# Altium PCB cold-sample-board-rev2.PcbDoc
Units mm, origin at the board's own origin, x right, y up, seen from the top; angles counter-clockwise.
Board outline 101.6 x 44.47 mm, 2 copper layers (Top Layer, Bottom Layer); 150 components, 85 nets, 346 pads, 160 vias.
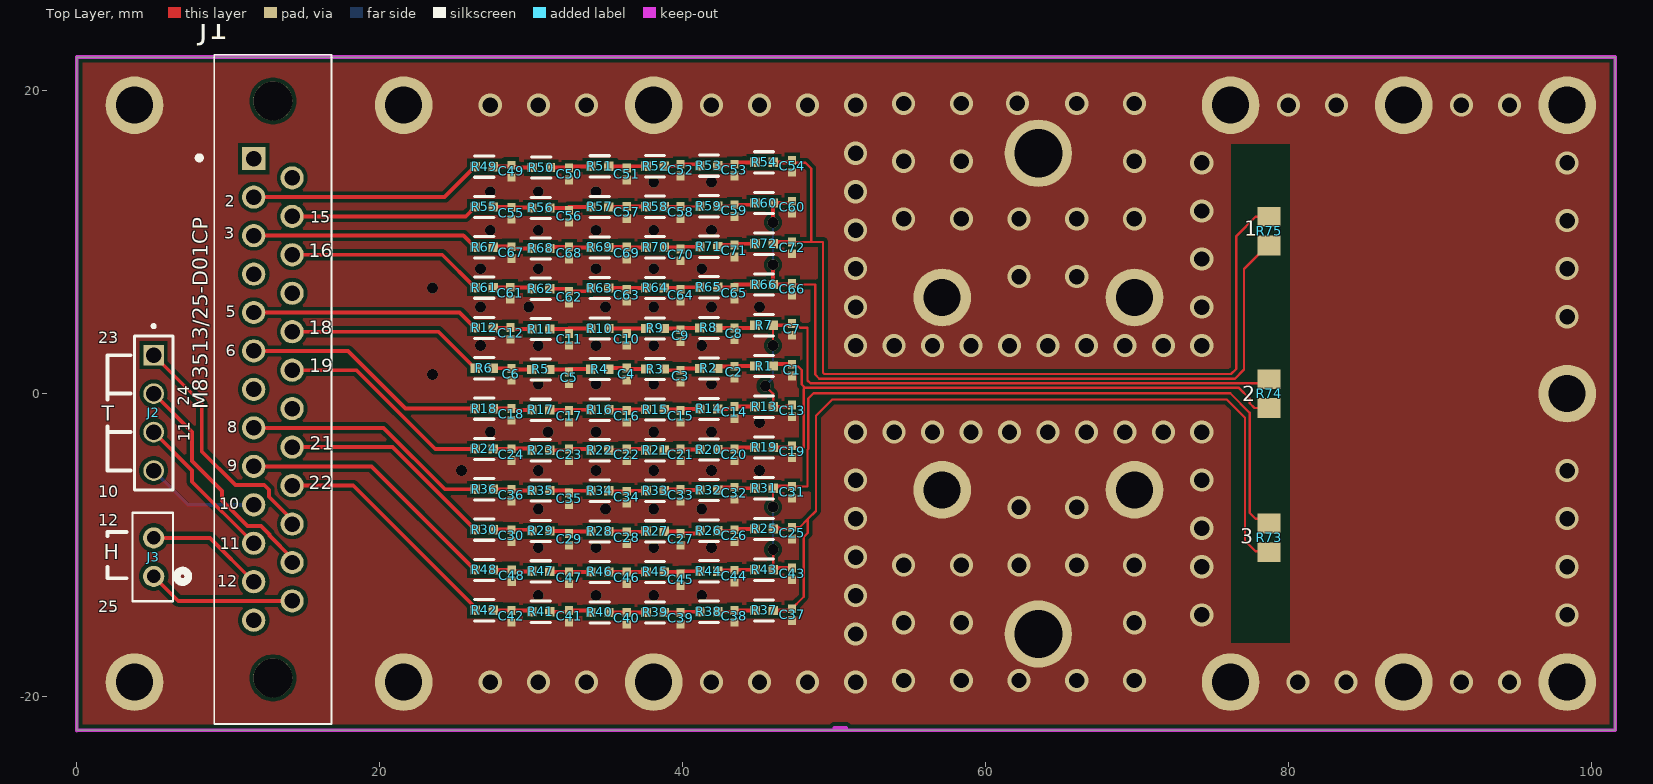
[diagram p0: Top Layer view]
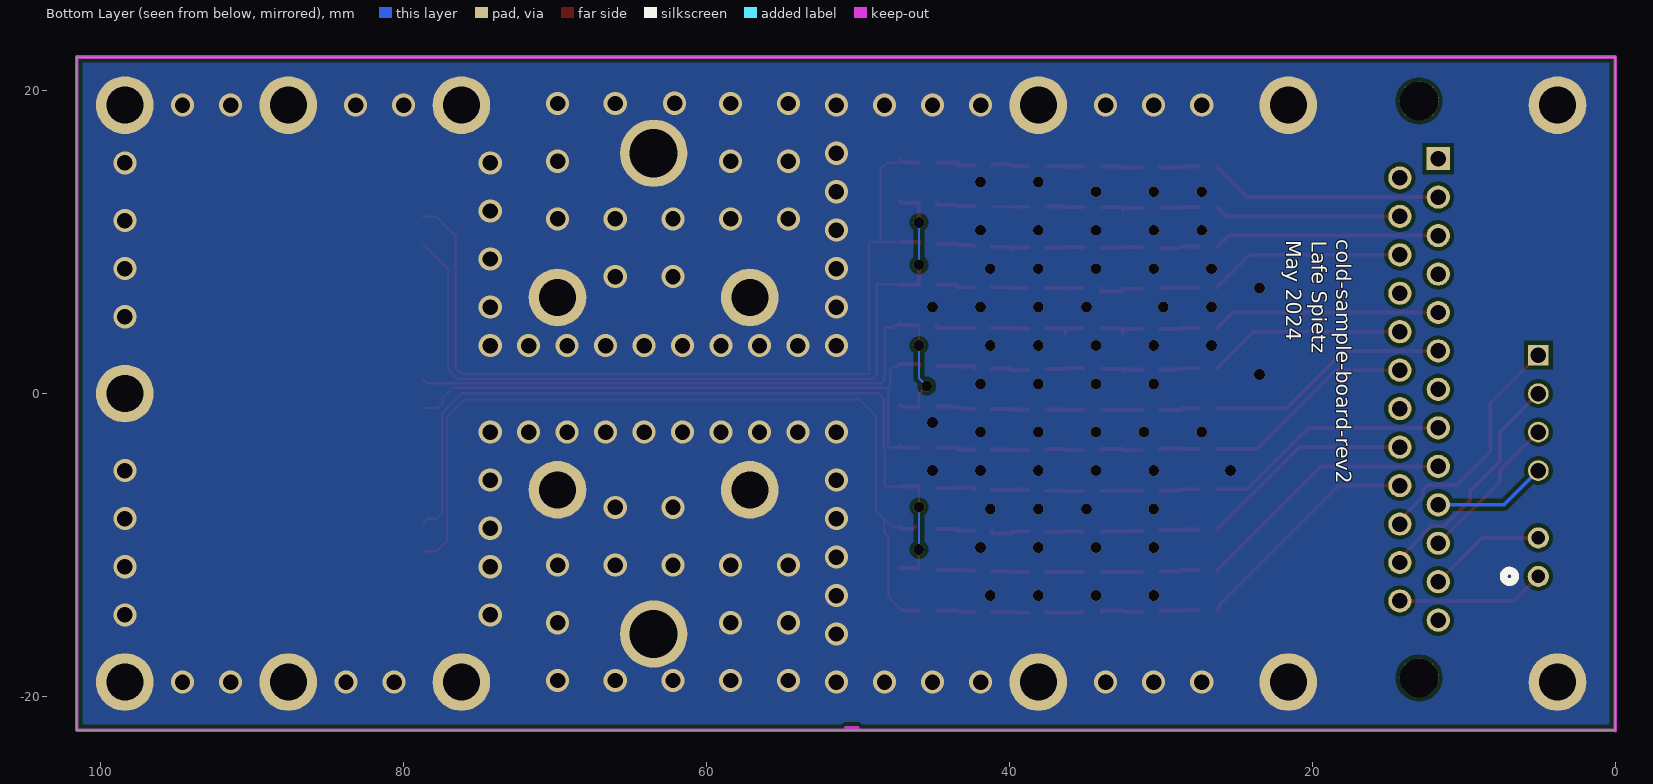
[diagram p1: Bottom Layer view, seen from below]

## Layer stack, top to bottom
Top Solder: solder mask 0.0102, Solder Resist, Dk 3.5
Top Layer: signal copper 0.0356
Dielectric 1: dielectric 0.32, FR-4, Dk 4.8
Bottom Layer: signal copper 0.0356
Bottom Solder: solder mask 0.0102, Solder Resist, Dk 3.5

## Board outline
0,-22.243 0,22.225 101.6,22.225 101.6,-22.225

## Design rules (kind name [scope] priority, off if disabled: settings)
Clearance [All] p1: gap=0.254 ignorepadtopadclearanceinfootprint=FALSE except(0: Arc-Hole Track-Hole SMDPad-Hole THPad-Hole Via-Hole Fill-Hole Poly-Hole Region-Hole Text-Hole; 0.152: Arc-Arc Arc-Track Track-Track)
PolygonConnect [All] p1: connectstyle=Direct reliefconductorwidth=0.254 reliefentries=4 polygonreliefangle="90 Angle" airgapwidth=0.254
RoutingVias [All] p1: holewidth=0.711 width=1.27 viastyle="Through Hole" minholewidth=0.711 minwidth=1.27 maxholewidth=0.711 maxwidth=1.27
SolderMaskExpansion [All] p1: expansion=0.102 istentingtop=FALSE
Width [All] p1: maxlimit=0.635 minlimit=0.152 preferedwidth=0.152 minimp=50.000000 maximp=50.000000 favimp=50.000000
30 further rules are at their usual default settings.

## Components (designator, comment, footprint, x,y, rotation, side; value= is the part's Value field where it differs from the comment)
C1 "04023C103MAT2A" CAPC1005X56X25LL10T15 47.244,1.557 r90 top
C2 "04023C103MAT2A" CAPC1005X56X25LL10T15 43.434,1.413 r90 top
C3 "04023C103MAT2A" CAPC1005X56X25LL10T15 39.878,1.159 r90 top
C4 "04023C103MAT2A" CAPC1005X56X25LL10T15 36.322,1.295 r90 top
C5 "04023C103MAT2A" CAPC1005X56X25LL10T15 32.512,1.041 r90 top
C6 "04023C103MAT2A" CAPC1005X56X25LL10T15 28.702,1.277 r90 top
C7 "04023C103MAT2A" CAPC1005X56X25LL10T15 47.244,4.248 r90 top
C8 "04023C103MAT2A" CAPC1005X56X25LL10T15 43.434,3.953 r90 top
C9 "04023C103MAT2A" CAPC1005X56X25LL10T15 39.878,3.835 r90 top
C10 "04023C103MAT2A" CAPC1005X56X25LL10T15 36.322,3.581 r90 top
C11 "04023C103MAT2A" CAPC1005X56X25LL10T15 32.512,3.581 r90 top
C12 "04023C103MAT2A" CAPC1005X56X25LL10T15 28.651,3.979 r90 top
C13 "04023C103MAT2A" CAPC1005X56X25LL10T15 47.244,-1.134 r90 top
C14 "04023C103MAT2A" CAPC1005X56X25LL10T15 43.434,-1.245 r90 top
C15 "04023C103MAT2A" CAPC1005X56X25LL10T15 39.878,-1.499 r90 top
C16 "04023C103MAT2A" CAPC1005X56X25LL10T15 36.322,-1.499 r90 top
C17 "04023C103MAT2A" CAPC1005X56X25LL10T15 32.512,-1.499 r90 top
C18 "04023C103MAT2A" CAPC1005X56X25LL10T15 28.702,-1.364 r90 top
C19 "04023C103MAT2A" CAPC1005X56X25LL10T15 47.244,-3.825 r90 top
C20 "04023C103MAT2A" CAPC1005X56X25LL10T15 43.434,-4.039 r90 top
C21 "04023C103MAT2A" CAPC1005X56X25LL10T15 39.878,-4.039 r90 top
C22 "04023C103MAT2A" CAPC1005X56X25LL10T15 36.322,-4.039 r90 top
C23 "04023C103MAT2A" CAPC1005X56X25LL10T15 32.512,-4.039 r90 top
C24 "04023C103MAT2A" CAPC1005X56X25LL10T15 28.702,-4.022 r90 top
C25 "04023C103MAT2A" CAPC1005X56X25LL10T15 47.244,-9.207 r90 top
C26 "04023C103MAT2A" CAPC1005X56X25LL10T15 43.434,-9.373 r90 top
C27 "04023C103MAT2A" CAPC1005X56X25LL10T15 39.878,-9.627 r90 top
C28 "04023C103MAT2A" CAPC1005X56X25LL10T15 36.322,-9.509 r90 top
C29 "04023C103MAT2A" CAPC1005X56X25LL10T15 32.512,-9.627 r90 top
C30 "04023C103MAT2A" CAPC1005X56X25LL10T15 28.702,-9.382 r90 top
C31 "04023C103MAT2A" CAPC1005X56X25LL10T15 47.244,-6.516 r90 top
C32 "04023C103MAT2A" CAPC1005X56X25LL10T15 43.434,-6.579 r90 top
C33 "04023C103MAT2A" CAPC1005X56X25LL10T15 39.878,-6.715 r90 top
C34 "04023C103MAT2A" CAPC1005X56X25LL10T15 36.322,-6.833 r90 top
C35 "04023C103MAT2A" CAPC1005X56X25LL10T15 32.512,-6.951 r90 top
C36 "04023C103MAT2A" CAPC1005X56X25LL10T15 28.702,-6.698 r90 top
C37 "04023C103MAT2A" CAPC1005X56X25LL10T15 47.244,-14.589 r90 top
C38 "04023C103MAT2A" CAPC1005X56X25LL10T15 43.434,-14.707 r90 top
C39 "04023C103MAT2A" CAPC1005X56X25LL10T15 39.878,-14.843 r90 top
C40 "04023C103MAT2A" CAPC1005X56X25LL10T15 36.322,-14.843 r90 top
C41 "04023C103MAT2A" CAPC1005X56X25LL10T15 32.512,-14.707 r90 top
C42 "04023C103MAT2A" CAPC1005X56X25LL10T15 28.702,-14.707 r90 top
C43 "04023C103MAT2A" CAPC1005X56X25LL10T15 47.244,-11.898 r90 top
C44 "04023C103MAT2A" CAPC1005X56X25LL10T15 43.434,-12.049 r90 top
C45 "04023C103MAT2A" CAPC1005X56X25LL10T15 39.878,-12.303 r90 top
C46 "04023C103MAT2A" CAPC1005X56X25LL10T15 36.322,-12.167 r90 top
C47 "04023C103MAT2A" CAPC1005X56X25LL10T15 32.512,-12.167 r90 top
C48 "04023C103MAT2A" CAPC1005X56X25LL10T15 28.727,-12.032 r90 top
C49 "04023C103MAT2A" CAPC1005X56X25LL10T15 28.71,14.696 r90 top
C50 "04023C103MAT2A" CAPC1005X56X25LL10T15 32.512,14.503 r90 top
C51 "04023C103MAT2A" CAPC1005X56X25LL10T15 36.322,14.503 r90 top
C52 "04023C103MAT2A" CAPC1005X56X25LL10T15 39.878,14.757 r90 top
C53 "04023C103MAT2A" CAPC1005X56X25LL10T15 43.434,14.757 r90 top
C54 "04023C103MAT2A" CAPC1005X56X25LL10T15 47.244,15.011 r90 top
C55 "04023C103MAT2A" CAPC1005X56X25LL10T15 28.71,11.906 r90 top
C56 "04023C103MAT2A" CAPC1005X56X25LL10T15 32.512,11.709 r90 top
C57 "04023C103MAT2A" CAPC1005X56X25LL10T15 36.322,11.963 r90 top
C58 "04023C103MAT2A" CAPC1005X56X25LL10T15 39.878,11.963 r90 top
C59 "04023C103MAT2A" CAPC1005X56X25LL10T15 43.434,12.081 r90 top
C60 "04023C103MAT2A" CAPC1005X56X25LL10T15 47.244,12.32 r90 top
C61 "04023C103MAT2A" CAPC1005X56X25LL10T15 28.626,6.629 r90 top
C62 "04023C103MAT2A" CAPC1005X56X25LL10T15 32.512,6.375 r90 top
C63 "04023C103MAT2A" CAPC1005X56X25LL10T15 36.322,6.493 r90 top
C64 "04023C103MAT2A" CAPC1005X56X25LL10T15 39.878,6.493 r90 top
C65 "04023C103MAT2A" CAPC1005X56X25LL10T15 43.434,6.629 r90 top
C66 "04023C103MAT2A" CAPC1005X56X25LL10T15 47.244,6.883 r90 top
C67 "04023C103MAT2A" CAPC1005X56X25LL10T15 28.71,9.317 r90 top
C68 "04023C103MAT2A" CAPC1005X56X25LL10T15 32.512,9.287 r90 top
C69 "04023C103MAT2A" CAPC1005X56X25LL10T15 36.322,9.287 r90 top
C70 "04023C103MAT2A" CAPC1005X56X25LL10T15 39.878,9.169 r90 top
C71 "04023C103MAT2A" CAPC1005X56X25LL10T15 43.434,9.423 r90 top
C72 "04023C103MAT2A" CAPC1005X56X25LL10T15 47.244,9.63 r90 top
J1 "M83513/25-D01CP" BEL_M83513/25-D01CP 12.954,0.279 r90 top
J2 "TSW-104-07-G-S" SAMTEC_TSW-104-07-G-S 5.08,-1.27 r270 top
J3 "TSW-102-07-G-S" CON2_1X2_TU_TSW 5.08,-10.795 r90 top
R1 "FC0402E50R0FTBST0" FP-FC0402-MFG 45.391,1.825 r180 top
R2 "FC0402E50R0FTBST0" FP-FC0402-MFG 41.745,1.665 r180 top
R3 "FC0402E50R0FTBST0" FP-FC0402-MFG 38.189,1.624 r180 top
R4 "FC0402E50R0FTBST0" FP-FC0402-MFG 34.544,1.619 r180 top
R5 "FC0402E50R0FTBST0" FP-FC0402-MFG 30.634,1.596 r180 top
R6 "FC0402E50R0FTBST0" FP-FC0402-MFG 26.913,1.673 r180 top
R7 "FC0402E50R0FTBST0" FP-FC0402-MFG 45.391,4.515 r180 top
R8 "FC0402E50R0FTBST0" FP-FC0402-MFG 41.745,4.343 r180 top
R9 "FC0402E50R0FTBST0" FP-FC0402-MFG 38.189,4.304 r180 top
R10 "FC0402E50R0FTBST0" FP-FC0402-MFG 34.544,4.297 r180 top
R11 "FC0402E50R0FTBST0" FP-FC0402-MFG 30.634,4.262 r180 top
R12 "FC0402E50R0FTBST0" FP-FC0402-MFG 26.913,4.337 r180 top
R13 "FC0402E50R0FTBST0" FP-FC0402-MFG 45.391,-0.865 r180 top
R14 "FC0402E50R0FTBST0" FP-FC0402-MFG 41.745,-1.014 r180 top
R15 "FC0402E50R0FTBST0" FP-FC0402-MFG 38.189,-1.055 r180 top
R16 "FC0402E50R0FTBST0" FP-FC0402-MFG 34.544,-1.06 r180 top
R17 "FC0402E50R0FTBST0" FP-FC0402-MFG 30.634,-1.07 r180 top
R18 "FC0402E50R0FTBST0" FP-FC0402-MFG 26.913,-0.99 r180 top
R19 "FC0402E50R0FTBST0" FP-FC0402-MFG 45.391,-3.555 r180 top
R20 "FC0402E50R0FTBST0" FP-FC0402-MFG 41.745,-3.692 r180 top
R21 "FC0402E50R0FTBST0" FP-FC0402-MFG 38.189,-3.735 r180 top
R22 "FC0402E50R0FTBST0" FP-FC0402-MFG 34.544,-3.738 r180 top
R23 "FC0402E50R0FTBST0" FP-FC0402-MFG 30.634,-3.736 r180 top
R24 "FC0402E50R0FTBST0" FP-FC0402-MFG 26.913,-3.654 r180 top
R25 "FC0402E50R0FTBST0" FP-FC0402-MFG 45.391,-8.935 r180 top
R26 "FC0402E50R0FTBST0" FP-FC0402-MFG 41.745,-9.049 r180 top
R27 "FC0402E50R0FTBST0" FP-FC0402-MFG 38.189,-9.094 r180 top
R28 "FC0402E50R0FTBST0" FP-FC0402-MFG 34.544,-9.096 r180 top
R29 "FC0402E50R0FTBST0" FP-FC0402-MFG 30.634,-9.069 r180 top
R30 "FC0402E50R0FTBST0" FP-FC0402-MFG 26.913,-8.981 r180 top
R31 "FC0402E50R0FTBST0" FP-FC0402-MFG 45.391,-6.245 r180 top
R32 "FC0402E50R0FTBST0" FP-FC0402-MFG 41.745,-6.371 r180 top
R33 "FC0402E50R0FTBST0" FP-FC0402-MFG 38.189,-6.414 r180 top
R34 "FC0402E50R0FTBST0" FP-FC0402-MFG 34.544,-6.417 r180 top
R35 "FC0402E50R0FTBST0" FP-FC0402-MFG 30.634,-6.403 r180 top
R36 "FC0402E50R0FTBST0" FP-FC0402-MFG 26.913,-6.318 r180 top
R37 "FC0402E50R0FTBST0" FP-FC0402-MFG 45.391,-14.316 r180 top
R38 "FC0402E50R0FTBST0" FP-FC0402-MFG 41.745,-14.406 r180 top
R39 "FC0402E50R0FTBST0" FP-FC0402-MFG 38.189,-14.453 r180 top
R40 "FC0402E50R0FTBST0" FP-FC0402-MFG 34.544,-14.453 r180 top
R41 "FC0402E50R0FTBST0" FP-FC0402-MFG 30.634,-14.401 r180 top
R42 "FC0402E50R0FTBST0" FP-FC0402-MFG 26.913,-14.309 r180 top
R43 "FC0402E50R0FTBST0" FP-FC0402-MFG 45.391,-11.626 r180 top
R44 "FC0402E50R0FTBST0" FP-FC0402-MFG 41.745,-11.728 r180 top
R45 "FC0402E50R0FTBST0" FP-FC0402-MFG 38.189,-11.773 r180 top
R46 "FC0402E50R0FTBST0" FP-FC0402-MFG 34.544,-11.774 r180 top
R47 "FC0402E50R0FTBST0" FP-FC0402-MFG 30.634,-11.735 r180 top
R48 "FC0402E50R0FTBST0" FP-FC0402-MFG 26.913,-11.645 r180 top
R49 "FC0402E50R0FTBST0" FP-FC0402-MFG 26.913,14.991 r180 top
R50 "FC0402E50R0FTBST0" FP-FC0402-MFG 30.671,14.926 r180 top
R51 "FC0402E50R0FTBST0" FP-FC0402-MFG 34.544,15.011 r180 top
R52 "FC0402E50R0FTBST0" FP-FC0402-MFG 38.189,15.021 r180 top
R53 "FC0402E50R0FTBST0" FP-FC0402-MFG 41.745,15.058 r180 top
R54 "FC0402E50R0FTBST0" FP-FC0402-MFG 45.391,15.275 r180 top
R55 "FC0402E50R0FTBST0" FP-FC0402-MFG 26.913,12.328 r180 top
R56 "FC0402E50R0FTBST0" FP-FC0402-MFG 30.634,12.26 r180 top
R57 "FC0402E50R0FTBST0" FP-FC0402-MFG 34.544,12.333 r180 top
R58 "FC0402E50R0FTBST0" FP-FC0402-MFG 38.189,12.342 r180 top
R59 "FC0402E50R0FTBST0" FP-FC0402-MFG 41.745,12.379 r180 top
R60 "FC0402E50R0FTBST0" FP-FC0402-MFG 45.391,12.585 r180 top
R61 "FC0402E50R0FTBST0" FP-FC0402-MFG 26.913,7 r180 top
R62 "FC0402E50R0FTBST0" FP-FC0402-MFG 30.634,6.928 r180 top
R63 "FC0402E50R0FTBST0" FP-FC0402-MFG 34.544,6.976 r180 top
R64 "FC0402E50R0FTBST0" FP-FC0402-MFG 38.189,6.983 r180 top
R65 "FC0402E50R0FTBST0" FP-FC0402-MFG 41.745,7.022 r180 top
R66 "FC0402E50R0FTBST0" FP-FC0402-MFG 45.391,7.205 r180 top
R67 "FC0402E50R0FTBST0" FP-FC0402-MFG 26.913,9.664 r180 top
R68 "FC0402E50R0FTBST0" FP-FC0402-MFG 30.634,9.594 r180 top
R69 "FC0402E50R0FTBST0" FP-FC0402-MFG 34.544,9.654 r180 top
R70 "FC0402E50R0FTBST0" FP-FC0402-MFG 38.189,9.662 r180 top
R71 "FC0402E50R0FTBST0" FP-FC0402-MFG 41.745,9.7 r180 top
R72 "FC0402E50R0FTBST0" FP-FC0402-MFG 45.391,9.895 r180 top
R73 "100" 6-0805 78.74,-9.525 r90 top
R74 "100" 6-0805 78.74,0 r90 top
R75 "100" 6-0805 78.74,10.734 r90 top

## Footprints (in the part's own frame and the unit in brackets; to place one, negate y for a bottom-side part, rotate by r counter-clockwise, add the part's x,y. Pads: shape width x height; smd on the part's side, far side on the other; paste and mask are expansions set on the pad)
6-0805 [mm] "Chip Resistor; Body 2 x 1.2 mm (LxW typ)"
  rect 1.3x1.5 smd paste-2: 1(-0.95,0) 2(0.95,0)
  body extent -1.07,-0.64 0.99,0.64, height 0.66
BEL_M83513/25-D01CP [mm]
  rect 1.53x1.53 hole 1.02: 1(15.24,1.27)
  round 1.53 hole 1.02: 2(12.7,1.27) 3(10.16,1.27) 4(7.62,1.27) 5(5.08,1.27) 6(2.54,1.27) 7(0,1.27) 8(-2.54,1.27) 9(-5.08,1.27) 10(-7.62,1.27) 11(-10.16,1.27) 12(-12.7,1.27) 13(-15.24,1.27) 14(13.97,-1.27) 15(11.43,-1.27) 16(8.89,-1.27) 17(6.35,-1.27) 18(3.81,-1.27) 19(1.27,-1.27) 20(-1.27,-1.27) 21(-3.81,-1.27) 22(-6.35,-1.27) 23(-8.89,-1.27) 24(-11.43,-1.27) 25(-13.97,-1.27)
  round 2.57 hole 2.57 unplated: ""(-19.05,0) ""(19.05,0)
  silkscreen extent -22.1,-3.88 22.1,5.01
CAPC1005X56X25LL10T15 [mm] "Chip Capacitor, 2-Leads, Body 1.00x0.50mm, IPC High Density"
  rect 0.58x0.54 smd: 1(-0.39,0) 2(0.39,0)
  body extent -0.55,-0.3 0.55,0.3, height 0.56
CON2_1X2_TU_TSW [mil]
  round 55 / inner round 60 / far side round 55 hole 35 paste-99999 mask+0: 1(-50,0) 2(50,0)
  silkscreen extent -115,-90 115,55
FP-FC0402-MFG [mm]
  rect 0.635x0.61 smd paste+0 mask+0: 1(-0.597,0) 2(0.597,0)
  silkscreen extent -0.64,-0.7 0.64,0.7, body extent -1.01,-0.44 1.01,0.44, height 0.25
SAMTEC_TSW-104-07-G-S [mm]
  rect 1.37x1.37 / inner round 1.37 / far side rect 1.37x1.37 hole 1.02: 01(-3.81,0)
  round 1.37 hole 1.02: 02(-1.27,0) 03(1.27,0) 04(3.81,0)
  silkscreen extent -5.83,-1.27 5.08,1.27

## Part data
C1 C2 C3 C4 C5 C6 C7 C8 C9 C10 C11 C12 C13 C14 C15 C16 C17 C18 C19 C20 C21 C22 C23 C24 C25 C26 C27 C28 C29 C30 C31 C32 C33 C34 C35 C36 C37 C38 C39 C40 C41 C42 C43 C44 C45 C46 C47 C48 C49 C50 C51 C52 C53 C54 C55 C56 C57 C58 C59 C60 C61 C62 C63 C64 C65 C66 C67 C68 C69 C70 C71 C72: library part CMP-2008-02518-1, Manufacturer="AVX Interconnect / Elco", Part Number=04023C103MAT2A
J1: "MIL-DTL-83513 PCB Mounted Connector", Package=None, Availability=Unavailable, MP=M83513/25-D01CP, Price=None
J2: "<a href=\"https://pricing.snapeda.com/parts/TSW-104-07-G-S/Samtec/view-part?ref=eda\">Check availability</a>", Package=None, Availability=Unavailable, MP=altium_native_batch, Price=None
J3: "No Description Available", Mfr_Name="Samtec Inc", Copyright="Copyright (C) 2024 Ultra Librarian. All rights reserved.", Manufacturer_Part_Number=TSW-102-07-G-S, RefDes=RefDes, Type=DEV
R1 R2 R3 R4 R5 R6 R7 R8 R9 R10 R11 R12 R13 R14 R15 R16 R17 R18 R19 R20 R21 R22 R23 R24 R25 R26 R27 R28 R29 R30 R31 R32 R33 R34 R35 R36 R37 R38 R39 R40 R41 R42 R43 R44 R45 R46 R47 R48 R49 R50 R51 R52 R53 R54 R55 R56 R57 R58 R59 R60 R61 R62 R63 R64 R65 R66 R67 R68 R69 R70 R71 R72: library part CMP-00030-23258606-1, "FC0402E50R0FTBST0 SMD Chip Resistor, 50 Ohm, ± 1%, 50 mW, 0402 [1005 Metric], Thin Film, High Frequency", Case/Package=0402, Max Operating Temperature=125°C, Min Operating Temperature=-55°C, Power Rating=50mW, Resistance=50Ω, Temperature Coefficient=25ppm/°C, Tolerance=1%, Voltage Rating=30V, Composition="Thin Film", Depth=510µm, Height=381µm, Length=1.016mm, Military Standard=Not, Mount="Surface Mount", NexarPartId=23258606, Packaging="Tape and Reel", Radiation Hardening=No, RoHS=Compliant, Termination=SMD/SMT
R73 R74 R75: library part "100 ohm 0805", "RES 100 OHM 1% 1/8W 0805", Supplier Part Number 1=RMCF0805FT100RCT-ND, Supplier 1=Digi-Key

## Free pads (board coordinates)
  round 3.81 hole 2.438: 2(21.59,19.05) 3(3.81,-19.05) 3(3.81,19.05) 3(21.59,-19.05) 3(38.1,-19.05) 3(38.1,19.05) 3(57.15,-6.35) 3(57.15,6.35) 3(69.85,-6.35) 3(69.85,6.35) 3(76.2,-19.05) 3(76.2,19.05) 3(87.63,-19.05) 3(87.63,19.05) 3(98.425,-19.05) 3(98.425,0) 3(98.425,19.05)
  round 4.445 hole 3.175: 3(63.5,-15.875) 3(63.5,15.875)

## Via types
v1: diameter 1.524, hole 1.016, Top Layer to Bottom Layer, 98 vias
v2: diameter 0.711, hole 0.711, Top Layer to Bottom Layer, 62 vias

## Nets (pads, with @x,y where several pads share a name; then routed paths per layer and width w, separated by ;. In a path a pad name is that pad's centre, name@x,y a point inside that pad or via, vN(x,y) a via of type N, cw(c..) or ccw(c..) an arc to the next point about the centre after c; other vN are vias at no path point)
GND: C1.1 C2.1 C3.1 C4.1 C5.1 C6.1 C7.1 C8.1 C9.1 C10.1 C11.1 C12.1 C13.1 C14.1 C15.1 C16.1 C17.1 C18.1 C19.1 C20.1 C21.1 C22.1 C23.1 C24.1 C25.1 C26.1 C27.1 C28.1 C29.1 C30.1 C31.1 C32.1 C33.1 C34.1 C35.1 C36.1 C37.1 C38.1 C39.1 C40.1 C41.1 C42.1 C43.1 C44.1 C45.1 C46.1 C47.1 C48.1 C49.1 C50.1 C51.1 C52.1 C53.1 C54.1 C55.1 C56.1 C57.1 C58.1 C59.1 C60.1 C61.1 C62.1 C63.1 C64.1 C65.1 C66.1 C67.1 C68.1 C69.1 C70.1 C71.1 C72.1 pad.2 pad.3
  other v1: 27.305,-19.05 30.48,-19.05 33.655,-19.05 41.91,-19.05 45.085,-19.05 48.26,-19.05 51.435,-19.05 80.645,-19.05 83.82,-19.05 91.44,-19.05 94.615,-19.05 54.606,-18.943 58.416,-18.943 62.226,-18.943 66.036,-18.943 69.846,-18.943 51.435,-15.875 54.606,-15.133 58.416,-15.133 69.846,-15.133 74.295,-14.605 98.425,-14.605 51.435,-13.335 74.295,-11.43 98.425,-11.43 54.606,-11.323 58.416,-11.323 62.226,-11.323 66.036,-11.323 69.846,-11.323 51.435,-10.795 74.295,-8.89 51.435,-8.255 98.425,-8.255 62.226,-7.513 66.036,-7.513 51.435,-5.715 74.295,-5.715 98.425,-5.08 51.435,-2.54 53.975,-2.54 56.515,-2.54 59.055,-2.54 61.595,-2.54 64.135,-2.54 66.675,-2.54 69.215,-2.54 71.755,-2.54 74.295,-2.54 51.435,3.175 53.975,3.175 56.515,3.175 59.055,3.175 61.595,3.175 64.135,3.175 66.675,3.175 69.215,3.175 71.755,3.175 74.295,3.175 98.425,5.08 51.435,5.715 74.295,5.715 62.226,7.727 66.036,7.727 51.435,8.255 98.425,8.255 74.295,8.89 51.435,10.795 98.425,11.43 54.606,11.537 58.416,11.537 62.226,11.537 66.036,11.537 69.846,11.537 74.295,12.065 51.435,13.335 74.295,15.24 98.425,15.24 54.606,15.347 58.416,15.347 69.846,15.347 51.435,15.875 27.305,19.05 30.48,19.05 33.655,19.05 41.91,19.05 45.085,19.05 48.26,19.05 51.435,19.05 80.01,19.05 83.185,19.05 91.44,19.05 94.615,19.05 54.606,19.157 58.416,19.157 66.036,19.157 69.846,19.157 62.118,19.179
  other v2: 30.48,-13.335 34.29,-13.335 38.1,-13.335 41.275,-13.335 30.48,-10.16 34.29,-10.16 38.1,-10.16 41.91,-10.16 30.48,-7.62 34.925,-7.62 38.1,-7.62 41.275,-7.62 25.4,-5.08 30.48,-5.08 34.29,-5.08 38.1,-5.08 41.91,-5.08 45.085,-5.08 27.305,-2.54 31.115,-2.54 34.29,-2.54 38.1,-2.54 41.91,-2.54 45.085,-1.905 30.48,0.635 34.29,0.635 38.1,0.635 41.91,0.635 23.495,1.27 26.67,3.175 30.48,3.175 34.29,3.175 38.1,3.175 41.275,3.175 26.67,5.715 29.845,5.715 34.925,5.715 38.1,5.715 41.91,5.715 45.085,5.715 23.495,6.985 26.67,8.255 30.48,8.255 34.29,8.255 38.1,8.255 41.275,8.255 27.305,10.795 30.48,10.795 34.29,10.795 38.1,10.795 41.91,10.795 27.305,13.335 30.48,13.335 34.29,13.335 38.1,13.97 41.91,13.97
NetC1_2: C1.2 C19.2 R1.1 R19.1 R74.1 | length 40.9
  Top Layer w0.152: C19.2 47.244,-3.531 48.006,-3.531 48.006,0.292 48.095,0.381 ; C1.2 47.404,1.787 47.651,1.787 47.873,1.565 47.873,0.603 48.095,0.381 ; R74.1 77.785,-0.95 77.47,-0.635 77.47,-0.343 76.746,0.381 48.095,0.381
  Top Layer w0.254: R19.1 46.805,-3.555 46.816,-3.544 47.135,-3.544 C19.2 ; R1.1 45.988,1.947 C1.2
NetC2_2: C2.2 R1.2 R2.1 | length 2.6
  Top Layer w0.254: R2.1 42.342,1.803 C2.2 43.434,1.825 R1.2
NetC3_2: C3.2 R2.2 R3.1 | length 2.6
  Top Layer w0.254: R3.1 38.786,1.549 C3.2 39.878,1.665 R2.2
NetC4_2: C4.2 R3.2 R4.1 | length 2.6
  Top Layer w0.254: R4.1 35.141,1.685 C4.2 36.322,1.624 R3.2
NetC5_2: C5.2 R4.2 R5.1 | length 2.9
  Top Layer w0.254: R5.1 C5.2@32.512,1.596 ; C5.2 C5.2@32.512,1.596 ; R4.2 32.512,1.619 C5.2@32.512,1.596
NetC6_2: C6.2 R5.2 R6.1 | length 2.6
  Top Layer w0.254: R6.1 28.702,1.673 C6.2 28.702,1.596 R5.2
NetC7_2: C7.2 C13.2 R7.1 R13.1 R74.2 | length 43.7
  Top Layer w0.152: v2(45.466,0.508) 45.988,-0.014 R13.1 ; v2(45.974,3.175) 45.974,4.501 R7.1 ; C7.2 47.404,4.478 47.651,4.478 47.785,4.343 48.26,4.343 48.26,0.877 48.451,0.686 78.476,0.686 R74.2
  Top Layer w0.254: R13.1 46.804,-0.865 46.816,-0.853 47.135,-0.853 C13.2 ; R7.1 46.802,4.515 46.816,4.529 47.135,4.529 C7.2
  Bottom Layer w0.152: v2(45.466,0.508) 45.974,1.016 v2(45.974,3.175)
NetC8_2: C8.2 R7.2 R8.1 | length 2.6
  Top Layer w0.254: R8.1 C8.2 44.794,4.343 R7.2
NetC9_2: C9.2 R8.2 R9.1 | length 2.5
  Top Layer w0.254: R9.1 C9.2@39.878,4.304 ; C9.2 C9.2@39.878,4.304 ; R8.2 39.878,4.343 C9.2@39.878,4.304
NetC10_2: C10.2 R9.2 R10.1 | length 2.8
  Top Layer w0.254: R10.1 36.322,4.297 ; C10.2 36.322,4.297 ; R9.2 36.322,4.304 36.322,4.297
NetC11_2: C11.2 R10.2 R11.1 | length 3
  Top Layer w0.254: R11.1 32.512,4.262 ; C11.2 32.512,4.262 ; R10.2 32.512,4.297 32.512,4.262
NetC12_2: C12.2 R11.2 R12.1 | length 2.6
  Top Layer w0.254: R12.1 C12.2@28.651,4.337 ; C12.2 C12.2@28.651,4.337 ; R11.2 28.651,4.262 C12.2@28.651,4.337
NetC14_2: C14.2 R13.2 R14.1 | length 2.5
  Top Layer w0.254: R14.1 42.956,-1.014 43.006,-0.964 43.325,-0.964 C14.2 44.794,-0.855 R13.2
NetC15_2: C15.2 R14.2 R15.1 | length 2.4
  Top Layer w0.254: R15.1 39.878,-1.055 39.878,-1.014 R14.2
NetC16_2: C16.2 R15.2 R16.1 | length 2.5
  Top Layer w0.254: R16.1 C16.2@36.322,-1.06 ; C16.2 C16.2@36.322,-1.06 ; R15.2 36.322,-1.055 C16.2@36.322,-1.06
NetC17_2: C17.2 R16.2 R17.1 | length 2.7
  Top Layer w0.254: R17.1 32.512,-1.07 32.512,-1.06 R16.2
NetC18_2: C18.2 R17.2 R18.1 | length 2.6
  Top Layer w0.254: R18.1 C18.2@28.702,-0.99 ; C18.2 C18.2@28.702,-0.99 ; R17.2 28.702,-1.07 C18.2@28.702,-0.99
NetC20_2: C20.2 R19.2 R20.1 | length 2.6
  Top Layer w0.254: R20.1 43.434,-3.692 C20.2 43.434,-3.555 R19.2
NetC21_2: C21.2 R20.2 R21.1 | length 2.4
  Top Layer w0.254: R21.1 39.878,-3.735 39.878,-3.692 R20.2
NetC22_2: C22.2 R21.2 R22.1 | length 2.6
  Top Layer w0.254: R22.1 36.322,-3.738 C22.2 37.592,-3.649 R21.2
NetC23_2: C23.2 R22.2 R23.1 | length 2.9
  Top Layer w0.254: R23.1 32.512,-3.736 C23.2 33.947,-3.649 R22.2
NetC24_2: C24.2 R23.2 R24.1 | length 2.7
  Top Layer w0.254: R24.1 28.702,-3.654 C24.2 30.037,-3.632 R23.2
NetC25_2: C25.2 C37.2 R25.1 R37.1 R73.1 | length 56.4
  Top Layer w0.152: C37.2@47.135,-14.308 47.135,-14.288 48.006,-13.417 48.006,-9.472 48.28,-9.198 48.28,-8.28 ; C25.2 47.743,-8.817 48.28,-8.28 ; R73.1 78.679,-10.414 77.851,-10.414 77.153,-9.716 77.153,-1.587 75.946,-0.381 49.891,-0.381 48.817,-1.455 48.817,-7.743 48.28,-8.28
  Top Layer w0.254: R37.1 46.808,-14.316 46.816,-14.308 C37.2@47.135,-14.308 ; R25.1@46.228,-8.766 46.397,-8.935 46.807,-8.935 46.816,-8.926 47.135,-8.926 C25.2
NetC26_2: C26.2 R25.2 R26.1 | length 2.6
  Top Layer w0.254: R26.1 43.434,-9.049 C26.2 43.434,-8.935 R25.2
NetC27_2: C27.2 R26.2 R27.1 | length 2.7
  Top Layer w0.254: R27.1 39.878,-9.094 C27.2 41.148,-9.237 R26.2
NetC28_2: C28.2 R27.2 R28.1 | length 2.5
  Top Layer w0.254: R28.1 36.322,-9.096 C28.2 37.592,-9.119 R27.2
NetC29_2: C29.2 R28.2 R29.1 | length 2.7
  Top Layer w0.254: R29.1 32.512,-9.069 32.512,-9.096 R28.2
NetC30_2: C30.2 R29.2 R30.1 | length 2.6
  Top Layer w0.254: R30.1 28.702,-8.981 C30.2 30.037,-8.992 R29.2
NetC31_2: C31.2 C43.2 R31.1 R43.1 R73.2 | length 52.9
  Top Layer w0.152: v2(45.974,-7.493) 45.974,-6.259 R31.1 ; R43.1 45.988,-11.508 v2(45.988,-10.301) ; C31.2 48.26,-6.126 48.26,-3.708 48.311,-3.657 48.311,-0.318 48.654,0.025 76.175,0.025 77.47,-1.27 77.47,-7.874 77.851,-8.255 78.42,-8.255 R73.2
  Top Layer w0.254: R43.1@45.988,-11.508 C43.2 ; R31.1 45.988,-6.126 C31.2
  Bottom Layer w0.152: v2(45.974,-7.493) 45.974,-10.287 v2(45.988,-10.301)
NetC32_2: C32.2 R31.2 R32.1 | length 2.7
  Top Layer w0.254: R32.1 42.342,-6.189 C32.2 43.434,-6.245 R31.2
NetC33_2: C33.2 R32.2 R33.1 | length 2.5
  Top Layer w0.254: R33.1 38.786,-6.325 C33.2 39.878,-6.371 R32.2
NetC34_2: C34.2 R33.2 R34.1 | length 2.5
  Top Layer w0.254: R34.1 35.141,-6.443 C34.2 36.322,-6.414 R33.2
NetC35_2: C35.2 R34.2 R35.1 | length 2.7
  Top Layer w0.254: R35.1 32.512,-6.403 32.512,-6.417 R34.2
NetC36_2: C36.2 R35.2 R36.1 | length 2.6
  Top Layer w0.254: R36.1 C36.2@28.702,-6.318 ; C36.2 C36.2@28.702,-6.318 ; R35.2 28.702,-6.403 C36.2@28.702,-6.318
NetC38_2: C38.2 R37.2 R38.1 | length 2.5
  Top Layer w0.254: R38.1 43.434,-14.406 C38.2 ; C38.2 R37.2
NetC39_2: C39.2 R38.2 R39.1 | length 2.4
  Top Layer w0.254: R39.1 C39.2 39.878,-14.406 R38.2
NetC40_2: C40.2 R39.2 R40.1 | length 2.5
  Top Layer w0.254: R40.1 C40.2 R39.2
NetC41_2: C41.2 R40.2 R41.1 | length 2.9
  Top Layer w0.254: R41.1 32.512,-14.401 C41.2 33.947,-14.317 R40.2
NetC42_2: C42.2 R41.2 R42.1 | length 2.6
  Top Layer w0.254: R42.1 28.702,-14.309 C42.2 30.037,-14.317 R41.2
NetC44_2: C44.2 R43.2 R44.1 | length 2.6
  Top Layer w0.254: R44.1 42.342,-11.659 C44.2 43.434,-11.626 R43.2
NetC45_2: C45.2 R44.2 R45.1 | length 2.4
  Top Layer w0.254: R45.1 39.878,-11.773 39.878,-11.728 R44.2
NetC46_2: C46.2 R45.2 R46.1 | length 2.5
  Top Layer w0.254: R46.1 35.141,-11.777 C46.2 36.322,-11.773 R45.2
NetC47_2: C47.2 R46.2 R47.1 | length 2.8
  Top Layer w0.254: R47.1 31.231,-11.777 C47.2 32.512,-11.774 R46.2
NetC48_2: C48.2 R47.2 R48.1 | length 2.6
  Top Layer w0.254: R48.1 C48.2@28.727,-11.645 ; C48.2 C48.2@28.727,-11.645 ; R47.2 28.727,-11.735 C48.2@28.727,-11.645
NetC49_2: C49.2 R49.1 R50.2 | length 2.6
  Top Layer w0.254: R49.1 28.71,14.991 28.724,14.977 29.137,14.977 29.188,14.926 R50.2
NetC50_2: C50.2 R50.1 R51.2 | length 2.8
  Top Layer w0.254: R50.1 C50.2@32.512,14.926 ; C50.2 C50.2@32.512,14.926 ; R51.2 32.512,15.011 C50.2@32.512,14.926
NetC51_2: C51.2 R51.1 R52.2 | length 2.6
  Top Layer w0.254: R51.1 C51.2@36.322,15.011 ; C51.2 C51.2@36.322,15.011 ; R52.2 36.322,15.021 C51.2@36.322,15.011
NetC52_2: C52.2 R52.1 R53.2 | length 2.5
  Top Layer w0.254: R52.1 39.433,15.021 39.45,15.038 39.769,15.038 C52.2 41.148,15.147 R53.2
NetC53_2: C53.2 R53.1 R54.2 | length 2.7
  Top Layer w0.254: R53.1 43.434,15.058 C53.2 43.434,15.275 R54.2
NetC54_2: C54.2 C72.2 R54.1 R72.1 R75.2 | length 58.6
  Top Layer w0.152: C72.2 48.514,10.02 ; C54.2 47.404,15.242 48.131,15.242 48.514,14.859 48.514,10.02 ; R75.2 77.851,11.684 76.581,10.414 76.581,1.651 76.225,1.295 49.365,1.295 49.276,1.385 49.276,10.02 48.514,10.02
  Top Layer w0.254: R72.1 45.988,10.02 C72.2 ; R54.1 46.799,15.275 46.816,15.292 47.135,15.292 C54.2
NetC55_2: C55.2 R55.1 R56.2 | length 2.6
  Top Layer w0.254: R55.1 28.71,12.328 C55.2 30.037,12.296 R56.2
NetC56_2: C56.2 R56.1 R57.2 | length 2.9
  Top Layer w0.254: R56.1 C56.2@32.512,12.26 ; C56.2 C56.2@32.512,12.26 ; R57.2 32.512,12.333 C56.2@32.512,12.26
NetC57_2: C57.2 R57.1 R58.2 | length 2.5
  Top Layer w0.254: R57.1 36.322,12.333 36.337,12.348 37.586,12.348 R58.2
NetC58_2: C58.2 R58.1 R59.2 | length 2.4
  Top Layer w0.152: C58.2 41.122,12.353 R59.2
  Top Layer w0.254: R58.1 39.878,12.342 C58.2
NetC59_2: C59.2 R59.1 R60.2 | length 2.7
  Top Layer w0.254: R59.1 43.434,12.379 C59.2 44.794,12.471 R60.2
NetC60_2: C60.2 C66.2 R60.1 R66.1 R75.1 | length 53
  Top Layer w0.152: C66.2@47.244,7.205 48.768,7.205 48.768,1.258 49.036,0.991 76.491,0.991 77.089,1.588 77.089,8.233 78.64,9.784 R75.1
  Top Layer w0.254: v2(45.974,8.509) 45.988,8.495 R66.1 C66.2@47.244,7.205 ; v2(45.974,11.303) 45.981,11.31 45.981,12.578 R60.1 46.8,12.585 46.816,12.601 47.135,12.601 C60.2
  Bottom Layer w0.152: v2(45.974,8.509) v2(45.974,11.303)
NetC61_2: C61.2 R61.1 R62.2 | length 2.6
  Top Layer w0.254: R61.1 28.626,7 C61.2 30.037,7.019 R62.2
NetC62_2: C62.2 R62.1 R63.2 | length 3.1
  Top Layer w0.254: R62.1 32.512,6.928 C62.2 33.947,6.765 R63.2
NetC63_2: C63.2 R63.1 R64.2 | length 2.6
  Top Layer w0.254: R63.1 C63.2@36.322,6.976 ; C63.2 C63.2@36.322,6.976 ; R64.2 36.322,6.983 C63.2@36.322,6.976
NetC64_2: C64.2 R64.1 R65.2 | length 2.4
  Top Layer w0.254: R64.1 39.878,6.983 39.878,7.022 R65.2
NetC65_2: C65.2 R65.1 R66.2 | length 2.6
  Top Layer w0.254: R65.1 C65.2@43.434,7.022 ; C65.2 C65.2@43.434,7.022 ; R66.2 43.434,7.205 C65.2@43.434,7.022
NetC67_2: C67.2 R67.1 R68.2 | length 2.6
  Top Layer w0.254: R67.1 27.51,9.707 C67.2 28.819,9.598 29.137,9.598 29.142,9.594 R68.2
NetC68_2: C68.2 R68.1 R69.2 | length 2.8
  Top Layer w0.254: R68.1 31.231,9.677 C68.2 32.512,9.654 R69.2
NetC69_2: C69.2 R69.1 R70.2 | length 2.5
  Top Layer w0.254: R69.1 35.141,9.677 C69.2 36.322,9.662 R70.2
NetC70_2: C70.2 R70.1 R71.2 | length 2.5
  Top Layer w0.254: R70.1 C70.2@39.878,9.662 ; C70.2 C70.2@39.878,9.662 ; R71.2 39.878,9.7 C70.2@39.878,9.662
NetC71_2: C71.2 R71.1 R72.2 | length 2.6
  Top Layer w0.254: R71.1 42.342,9.813 C71.2 43.434,9.895 R72.2
NetJ1_2: J1.2 R49.2 | length 15.5
  Top Layer w0.254: J1.2 24.292,12.979 26.304,14.991 R49.2
NetJ1_3: J1.3 R67.2 | length 15
  Top Layer w0.254: J1.3 25.528,10.439 26.304,9.664 R67.2
NetJ1_5: J1.5 R12.2 | length 15.1
  Top Layer w0.254: J1.5 25.281,5.359 26.304,4.337 R12.2
NetJ1_6: J1.6 R18.2 | length 16.2
  Top Layer w0.254: J1.6 17.907,2.819 21.717,-0.99 R18.2
NetJ1_8: J1.8 R36.2 | length 16.3
  Top Layer w0.254: J1.8 20.249,-2.261 24.306,-6.318 R36.2
NetJ1_9: J1.9 R48.2 | length 17.5
  Top Layer w0.254: J1.9 19.459,-4.801 26.304,-11.645 R48.2
NetJ1_10: J1.10 J2.04 | length 7.5
  Bottom Layer w0.254: J2.04 7.341,-7.341 J1.10
NetJ1_11: J1.11 J2.03 | length 10.1
  Top Layer w0.254: J2.03 7.62,-5.08 7.62,-5.817 J1.11
NetJ1_12: J1.12 J3.2 | length 7.8
  Top Layer w0.254: J3.2 8.788,-9.525 J1.12
NetJ1_15: J1.15 R55.2 | length 12.3
  Top Layer w0.254: J1.15 25.685,11.709 26.304,12.328 R55.2
NetJ1_16: J1.16 R61.2 | length 13
  Top Layer w0.254: J1.16 24.135,9.169 26.304,7 R61.2
NetJ1_18: J1.18 R6.2 | length 13.1
  Top Layer w0.254: J1.18 23.887,4.089 26.304,1.673 R6.2
NetJ1_19: J1.19 R24.2 | length 14.2
  Top Layer w0.254: J1.19 18.466,1.549 23.67,-3.654 R24.2
NetJ1_21: J1.21 R30.2 | length 14.3
  Top Layer w0.254: J1.21 20.853,-3.531 26.304,-8.981 R30.2
NetJ1_22: J1.22 R42.2 | length 15.6
  Top Layer w0.254: J1.22 18.258,-6.071 26.126,-13.938 26.126,-14.131 26.304,-14.309 R42.2
NetJ1_23: J1.23 J2.01 | length 16.1
  Top Layer w0.254: J2.01 8.255,-0.635 8.255,-3.81 10.477,-6.032 12.382,-6.032 12.7,-6.35 12.7,-6.808 14.224,-8.332 J1.23
NetJ1_24: J1.24 J2.02 | length 15.5
  Top Layer w0.254: J2.02 7.62,-2.54 7.62,-4.445 9.6,-6.425 9.6,-7.06 11.275,-8.735 12.159,-8.735 12.723,-9.299 12.723,-9.37 14.224,-10.872 J1.24
NetJ1_25: J1.25 J3.1 | length 9.8
  Top Layer w0.254: J3.1 6.706,-13.691 J1.25
pads on no net: J1. J1.1 J1.4 J1.7 J1.13 J1.14 J1.17 J1.20

## Polygon pours and split planes (outlines as drawn)
GND on Top Layer "NONET_L02_P-001" (solid, pour order 3): 76.2,22.225 76.2,16.5 80.137,16.5 80.137,-16.5 76.2,-16.5 76.2,-22.225 101.6,-22.225 101.6,22.225
GND on Top Layer "NONET_L02_P-001" (solid, pour order 0): -0.093,-22.389 -0.093,22.061 76.2,22.061 76.2,-22.389
GND on Bottom Layer "NONET_L02_P-001" (solid, pour order 1): 0,-22.225 0,22.225 101.6,22.225 101.6,-22.225

## Keep-outs
Keep-Out Layer:
  lines w0.254: 0,-22.243 0,22.225 101.6,22.225 101.6,-22.225 0,-22.225 ; 50.038,-22.073 50.8,-22.073

## Silkscreen, mask and mechanical layers (free items; w line width, h text height)
Top Overlay:
  lines w0.254: 2.032,-11.43 2.032,-12.192 3.302,-12.192 ; 2.032,-9.398 2.032,-9.144 3.302,-9.144 ; 2.032,-2.159 2.032,-2.54 ; 2.032,-0.381 2.032,2.54 3.556,2.54 ; 2.032,0 3.556,0 ; 3.556,-5.08 2.032,-5.08 2.032,-2.794 2.032,-2.54 ; 3.556,-2.54 2.032,-2.54
  text "2" at 9.777,12.327 h0.76
  text "15" at 15.427,11.302 h0.76
  text "1" at 77.089,10.414 h1
  text "3" at 9.749,10.229 h0.76
  text "16" at 15.325,8.7 h1.52
  text "5" at 9.827,5.052 h0.76
  text "18" at 15.325,3.625 h1.52
  text "23" at 1.422,3.327 h0.76
  text "6" at 9.852,2.477 h0.76
  text "19" at 15.35,1.1 h1.52
  text "2" at 76.962,-0.508 h1
  text "24" at 7.423,-0.798 h0.76 r90
  text "M83513/25-D01CP" at 8.636,-1.016 h1 r90
  text "T" at 1.651,-1.778 h1
  text "8" at 9.924,-2.571 h0.76
  text "11" at 7.448,-3.173 h0.76 r90
  text "21" at 15.374,-3.992 h1.52
  text "9" at 9.949,-5.121 h0.76
  text "22" at 15.325,-6.625 h1.52
  text "10" at 1.422,-6.833 h0.76
  text "10" at 9.402,-7.648 h0.76
  text "12" at 1.422,-8.738 h0.76
  text "3" at 76.835,-9.906 h1
  text "11" at 9.452,-10.273 h0.76
  text "H" at 1.778,-10.922 h1
  text "12" at 9.277,-12.748 h0.76
  text "25" at 1.422,-14.453 h0.76
Bottom Overlay:
  text "cold-sample-board-rev2" at 18.438,10.196 h1 r90
  text "May 2024" at 21.738,10.121 h1 r90
  text "Lafe Spietz" at 20.038,10.096 h1 r90
Top Solder:
  region: 16.51,-22.225 16.51,-15.875 50.165,-15.875 50.165,-1.27 76.2,-1.27 76.2,-12.065 78.105,-12.065 78.105,13.335 76.2,13.335 76.2,1.905 50.165,1.905 50.165,16.51 16.51,16.51 16.51,22.225 101.6,22.225 101.6,-22.225
Bottom Solder:
  region: 16.51,-22.225 16.51,-15.875 50.165,-15.875 50.165,-1.27 50.165,1.905 50.165,16.51 16.51,16.51 16.51,22.225 101.555,22.225 101.582,22.252 101.6,22.234 101.6,-22.225
Mechanical 1:
  lines w0.254: 95.885,17.2 79.894,17.074 79.756,0.127 79.756,-16.573 95.484,-16.447 95.901,17.153
Mechanical 40:
  lines w0.254: 0,-22.225 0,22.225 25.4,22.225 25.4,-22.225 0,-22.225